# Altium PCB SolarPanel.PcbDoc
Units mm, origin at the board's own origin, x right, y up, seen from the top; angles counter-clockwise.
Board outline 96 x 213 mm, 2 copper layers (Top Layer, Bottom Layer); 126 components, 32 nets, 226 pads, 96 vias.
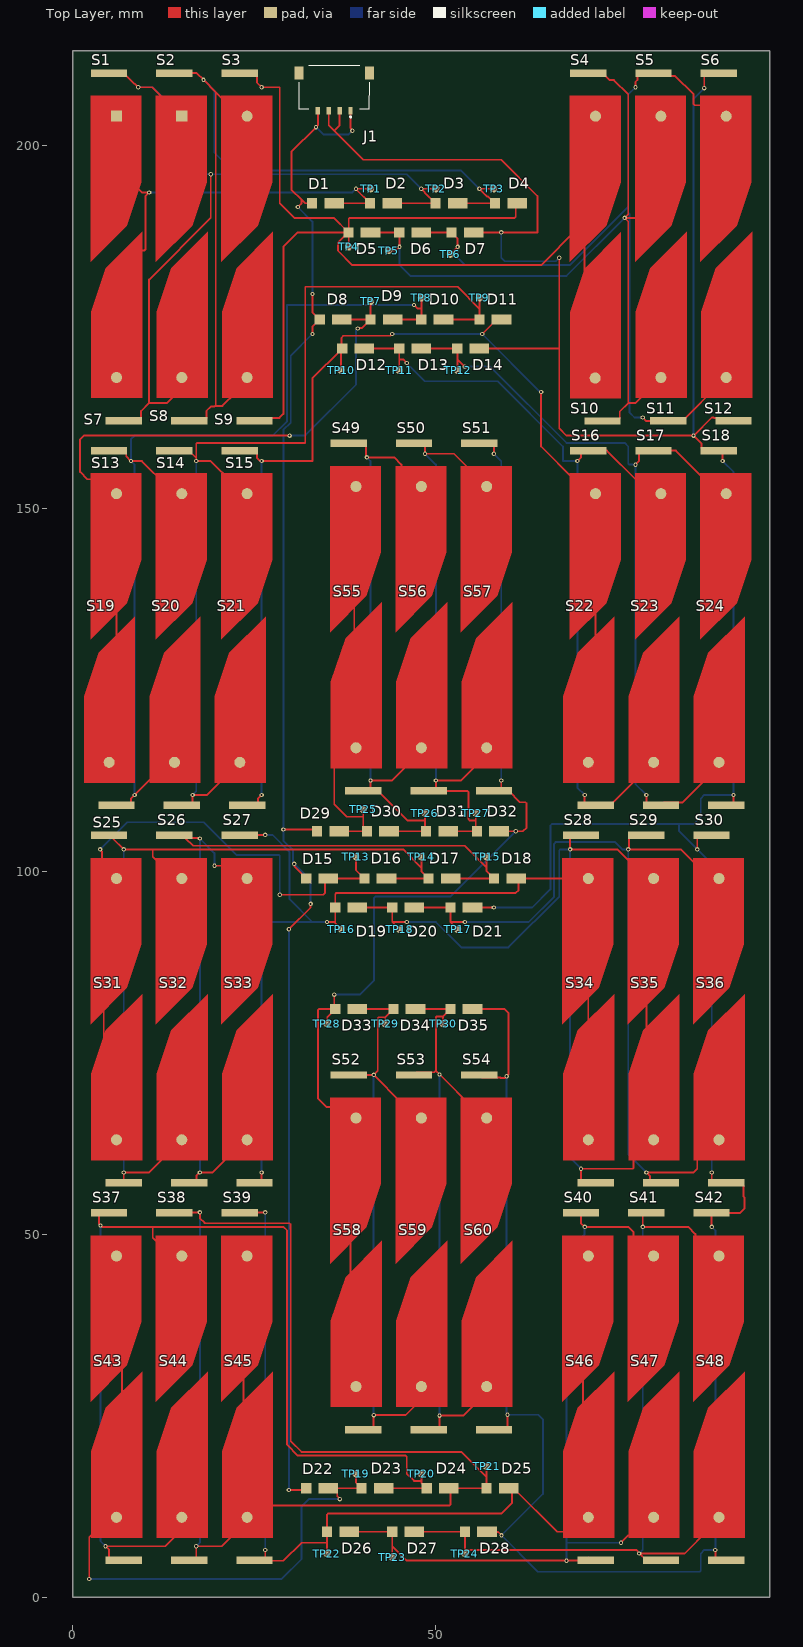
[diagram p0: Top Layer view]
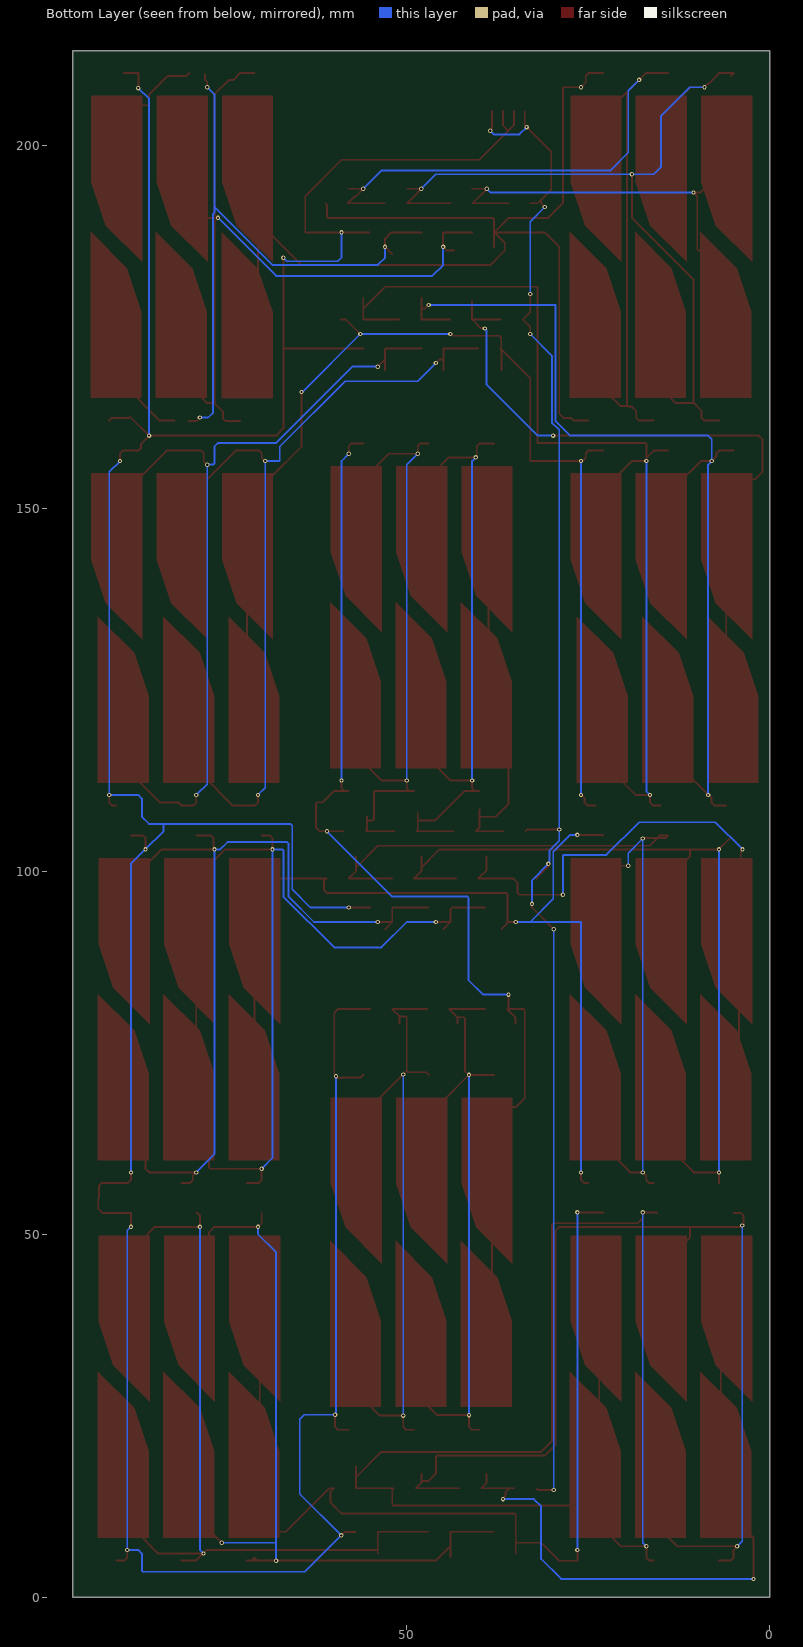
[diagram p1: Bottom Layer view, seen from below]

## Layer stack, top to bottom
Top Solder: solder mask 0.0102, Solder Resist, Dk 3.5
Top Layer: signal copper 0.0356
Dielectric 1: dielectric 0.32, FR-4, Dk 4.8
Bottom Layer: signal copper 0.0356
Bottom Solder: solder mask 0.0102, Solder Resist, Dk 3.5

## Board outline
0,0 96,0 96,213 0,213

## Design rules (kind name [scope] priority, off if disabled: settings)
Clearance [All] p1: gap=0.254 ignorepadtopadclearanceinfootprint=FALSE except(0: Arc-Hole Track-Hole SMDPad-Hole THPad-Hole Via-Hole Fill-Hole Poly-Hole Region-Hole Text-Hole)
PolygonConnect [All] p1: connectstyle=Relief reliefconductorwidth=0.254 reliefentries=4 polygonreliefangle="90 Angle" airgapwidth=0.254
RoomDefinition SolarPanel4 [InComponentClass('SolarPanel4')] p1: confinementstyle=ConfineIn formatcopy=TRUE lockcomponents=FALSE outline 0,0 96,0 96,213 0,213
RoutingVias [All] p1: holewidth=0.711 width=1.27 viastyle="Through Hole" minholewidth=0.711 minwidth=1.27 maxholewidth=0.711 maxwidth=1.27
SolderMaskExpansion [All] p1: expansion=0.102
Width [All] p1: maxlimit=0.254 minlimit=0.254 preferedwidth=0.254
30 further rules are at their usual default settings.

## Components (designator, comment, footprint, x,y, rotation, side; value= is the part's Value field where it differs from the comment)
D1 "SCHOTTKY_DIODE_B120-FDICT-NDSCHOTTKY_DIODE_B120-FDICT-ND" SB_DIODE 34.8,192 r180 top
D2 "SCHOTTKY_DIODE_B120-FDICT-NDSCHOTTKY_DIODE_B120-FDICT-ND" SB_DIODE 42.8,192 r180 top
D3 "SCHOTTKY_DIODE_B120-FDICT-NDSCHOTTKY_DIODE_B120-FDICT-ND" SB_DIODE 51.8,192 r180 top
D4 "SCHOTTKY_DIODE_B120-FDICT-NDSCHOTTKY_DIODE_B120-FDICT-ND" SB_DIODE 60,192 r180 top
D5 "SCHOTTKY_DIODE_B120-FDICT-NDSCHOTTKY_DIODE_B120-FDICT-ND" SB_DIODE 39.8,188 r180 top
D6 "SCHOTTKY_DIODE_B120-FDICT-NDSCHOTTKY_DIODE_B120-FDICT-ND" SB_DIODE 46.8,188 r180 top
D7 "SCHOTTKY_DIODE_B120-FDICT-NDSCHOTTKY_DIODE_B120-FDICT-ND" SB_DIODE 54,188 r180 top
D8 "SCHOTTKY_DIODE_B120-FDICT-NDSCHOTTKY_DIODE_B120-FDICT-ND" SB_DIODE 35.85,176 r180 top
D9 "SCHOTTKY_DIODE_B120-FDICT-NDSCHOTTKY_DIODE_B120-FDICT-ND" SB_DIODE 42.85,176 r180 top
D10 "SCHOTTKY_DIODE_B120-FDICT-NDSCHOTTKY_DIODE_B120-FDICT-ND" SB_DIODE 49.85,176 r180 top
D11 "SCHOTTKY_DIODE_B120-FDICT-NDSCHOTTKY_DIODE_B120-FDICT-ND" SB_DIODE 57.85,176 r180 top
D12 "SCHOTTKY_DIODE_B120-FDICT-NDSCHOTTKY_DIODE_B120-FDICT-ND" SB_DIODE 38.95,172 r180 top
D13 "SCHOTTKY_DIODE_B120-FDICT-NDSCHOTTKY_DIODE_B120-FDICT-ND" SB_DIODE 46.8,172 r180 top
D14 "SCHOTTKY_DIODE_B120-FDICT-NDSCHOTTKY_DIODE_B120-FDICT-ND" SB_DIODE 54.8,172 r180 top
D15 "SCHOTTKY_DIODE_B120-FDICT-NDSCHOTTKY_DIODE_B120-FDICT-ND" SB_DIODE 34,99 r180 top
D16 "SCHOTTKY_DIODE_B120-FDICT-NDSCHOTTKY_DIODE_B120-FDICT-ND" SB_DIODE 42,99 r180 top
D17 "SCHOTTKY_DIODE_B120-FDICT-NDSCHOTTKY_DIODE_B120-FDICT-ND" SB_DIODE 50.85,99 r180 top
D18 "SCHOTTKY_DIODE_B120-FDICT-NDSCHOTTKY_DIODE_B120-FDICT-ND" SB_DIODE 59.85,99 r180 top
D19 "SCHOTTKY_DIODE_B120-FDICT-NDSCHOTTKY_DIODE_B120-FDICT-ND" SB_DIODE 38,95 r180 top
D20 "SCHOTTKY_DIODE_B120-FDICT-NDSCHOTTKY_DIODE_B120-FDICT-ND" SB_DIODE 45.85,95 r180 top
D21 "SCHOTTKY_DIODE_B120-FDICT-NDSCHOTTKY_DIODE_B120-FDICT-ND" SB_DIODE 53.85,95 r180 top
D22 "SCHOTTKY_DIODE_B120-FDICT-NDSCHOTTKY_DIODE_B120-FDICT-ND" SB_DIODE 34,15 r180 top
D23 "SCHOTTKY_DIODE_B120-FDICT-NDSCHOTTKY_DIODE_B120-FDICT-ND" SB_DIODE 41.6,15 r180 top
D24 "SCHOTTKY_DIODE_B120-FDICT-NDSCHOTTKY_DIODE_B120-FDICT-ND" SB_DIODE 50.6,15 r180 top
D25 "SCHOTTKY_DIODE_B120-FDICT-NDSCHOTTKY_DIODE_B120-FDICT-ND" SB_DIODE 58.85,15 r180 top
D26 "SCHOTTKY_DIODE_B120-FDICT-NDSCHOTTKY_DIODE_B120-FDICT-ND" SB_DIODE 36.85,9 r180 top
D27 "SCHOTTKY_DIODE_B120-FDICT-NDSCHOTTKY_DIODE_B120-FDICT-ND" SB_DIODE 45.85,9 r180 top
D28 "SCHOTTKY_DIODE_B120-FDICT-NDSCHOTTKY_DIODE_B120-FDICT-ND" SB_DIODE 55.85,9 r180 top
D29 "SCHOTTKY_DIODE_B120-FDICT-NDSCHOTTKY_DIODE_B120-FDICT-ND" SB_DIODE 35.5,105.5 r180 top
D30 "SCHOTTKY_DIODE_B120-FDICT-NDSCHOTTKY_DIODE_B120-FDICT-ND" SB_DIODE 42.35,105.5 r180 top
D31 "SCHOTTKY_DIODE_B120-FDICT-NDSCHOTTKY_DIODE_B120-FDICT-ND" SB_DIODE 50.5,105.5 r180 top
D32 "SCHOTTKY_DIODE_B120-FDICT-NDSCHOTTKY_DIODE_B120-FDICT-ND" SB_DIODE 57.5,105.5 r180 top
D33 "SCHOTTKY_DIODE_B120-FDICT-NDSCHOTTKY_DIODE_B120-FDICT-ND" SB_DIODE 38,81 r180 top
D34 "SCHOTTKY_DIODE_B120-FDICT-NDSCHOTTKY_DIODE_B120-FDICT-ND" SB_DIODE 46,81 r180 top
D35 "SCHOTTKY_DIODE_B120-FDICT-NDSCHOTTKY_DIODE_B120-FDICT-ND" SB_DIODE 53.85,81 r180 top
J1 "5040500491" 5040500491 36,208 r0 top
S1 "SOLAR_CELL" SOLAR_CELL#1 2.444,183.934 r0 top
S2 "SOLAR_CELL" SOLAR_CELL#1 11.444,183.934 r0 top
S3 "SOLAR_CELL" SOLAR_CELL#2 20.444,183.934 r0 top
S4 "SOLAR_CELL" SOLAR_CELL#2 68.444,183.934 r0 top
S5 "SOLAR_CELL" SOLAR_CELL#2 77.444,183.934 r0 top
S6 "SOLAR_CELL" SOLAR_CELL#2 86.444,183.934 r0 top
S7 "SOLAR_CELL" SOLAR_CELL#2 9.556,188.066 r180 top
S8 "SOLAR_CELL" SOLAR_CELL#2 18.556,188.066 r180 top
S9 "SOLAR_CELL" SOLAR_CELL#2 27.556,188.066 r180 top
S10 "SOLAR_CELL" SOLAR_CELL#2 75.5,188 r180 top
S11 "SOLAR_CELL" SOLAR_CELL#2 84.556,188.066 r180 top
S12 "SOLAR_CELL" SOLAR_CELL#2 93.556,188.066 r180 top
S13 "SOLAR_CELL" SOLAR_CELL#2 2.444,131.934 r0 top
S14 "SOLAR_CELL" SOLAR_CELL#2 11.444,131.934 r0 top
S15 "SOLAR_CELL" SOLAR_CELL#2 20.444,131.934 r0 top
S16 "SOLAR_CELL" SOLAR_CELL#2 68.444,131.934 r0 top
S17 "SOLAR_CELL" SOLAR_CELL#2 77.444,131.934 r0 top
S18 "SOLAR_CELL" SOLAR_CELL#2 86.444,131.934 r0 top
S19 "SOLAR_CELL" SOLAR_CELL#2 8.556,135.066 r180 top
S20 "SOLAR_CELL" SOLAR_CELL#2 17.556,135.066 r180 top
S21 "SOLAR_CELL" SOLAR_CELL#2 26.556,135.066 r180 top
S22 "SOLAR_CELL" SOLAR_CELL#2 74.556,135.066 r180 top
S23 "SOLAR_CELL" SOLAR_CELL#2 83.556,135.066 r180 top
S24 "SOLAR_CELL" SOLAR_CELL#2 92.556,135.066 r180 top
S25 "SOLAR_CELL" SOLAR_CELL#2 2.444,78.934 r0 top
S26 "SOLAR_CELL" SOLAR_CELL#2 11.444,78.934 r0 top
S27 "SOLAR_CELL" SOLAR_CELL#2 20.444,78.934 r0 top
S28 "SOLAR_CELL" SOLAR_CELL#2 67.444,78.934 r0 top
S29 "SOLAR_CELL" SOLAR_CELL#2 76.444,78.934 r0 top
S30 "SOLAR_CELL" SOLAR_CELL#2 85.444,78.934 r0 top
S31 "SOLAR_CELL" SOLAR_CELL#2 9.556,83.066 r180 top
S32 "SOLAR_CELL" SOLAR_CELL#2 18.556,83.066 r180 top
S33 "SOLAR_CELL" SOLAR_CELL#2 27.556,83.066 r180 top
S34 "SOLAR_CELL" SOLAR_CELL#2 74.556,83.066 r180 top
S35 "SOLAR_CELL" SOLAR_CELL#2 83.556,83.066 r180 top
S36 "SOLAR_CELL" SOLAR_CELL#2 92.556,83.066 r180 top
S37 "SOLAR_CELL" SOLAR_CELL#2 2.444,26.934 r0 top
S38 "SOLAR_CELL" SOLAR_CELL#2 11.444,26.934 r0 top
S39 "SOLAR_CELL" SOLAR_CELL#2 20.444,26.934 r0 top
S40 "SOLAR_CELL" SOLAR_CELL#2 67.444,26.934 r0 top
S41 "SOLAR_CELL" SOLAR_CELL#2 76.444,26.934 r0 top
S42 "SOLAR_CELL" SOLAR_CELL#2 85.444,26.934 r0 top
S43 "SOLAR_CELL" SOLAR_CELL#2 9.556,31.066 r180 top
S44 "SOLAR_CELL" SOLAR_CELL#2 18.556,31.066 r180 top
S45 "SOLAR_CELL" SOLAR_CELL#2 27.556,31.066 r180 top
S46 "SOLAR_CELL" SOLAR_CELL#2 74.556,31.066 r180 top
S47 "SOLAR_CELL" SOLAR_CELL#2 83.556,31.066 r180 top
S48 "SOLAR_CELL" SOLAR_CELL#2 92.556,31.066 r180 top
S49 "SOLAR_CELL" SOLAR_CELL#2 35.444,132.934 r0 top
S50 "SOLAR_CELL" SOLAR_CELL#2 44.444,132.934 r0 top
S51 "SOLAR_CELL" SOLAR_CELL#2 53.444,132.934 r0 top
S52 "SOLAR_CELL" SOLAR_CELL#2 35.444,45.934 r0 top
S53 "SOLAR_CELL" SOLAR_CELL#2 44.444,45.934 r0 top
S54 "SOLAR_CELL" SOLAR_CELL#2 53.444,45.934 r0 top
S55 "SOLAR_CELL" SOLAR_CELL#2 42.556,137.066 r180 top
S56 "SOLAR_CELL" SOLAR_CELL#2 51.556,137.066 r180 top
S57 "SOLAR_CELL" SOLAR_CELL#2 60.556,137.066 r180 top
S58 "SOLAR_CELL" SOLAR_CELL#2 42.556,49.066 r180 top
S59 "SOLAR_CELL" SOLAR_CELL#2 51.556,49.066 r180 top
S60 "SOLAR_CELL" SOLAR_CELL#2 60.556,49.066 r180 top
TP1 "TEST_POINT" TEST_POINT 41,194 r180 top
TP2 "TEST_POINT" TEST_POINT 50,194 r180 top
TP3 "TEST_POINT" TEST_POINT 58,194 r180 top
TP4 "TEST_POINT" TEST_POINT 38,186 r180 top
TP5 "TEST_POINT" TEST_POINT 43.5,185.5 r180 top
TP6 "TEST_POINT" TEST_POINT 52,185 r180 top
TP7 "TEST_POINT" TEST_POINT 41,178.5 r180 top
TP8 "TEST_POINT" TEST_POINT 48,179 r180 top
TP9 "TEST_POINT" TEST_POINT 56,179 r90 top
TP10 "TEST_POINT" TEST_POINT 36.95,169 r180 top
TP11 "TEST_POINT" TEST_POINT 44.95,169 r180 top
TP12 "TEST_POINT" TEST_POINT 53,169 r180 top
TP13 "TEST_POINT" TEST_POINT 39,102 r180 top
TP14 "TEST_POINT" TEST_POINT 48,102 r180 top
TP15 "TEST_POINT" TEST_POINT 57,102 r180 top
TP16 "TEST_POINT" TEST_POINT 37,92 r180 top
TP17 "TEST_POINT" TEST_POINT 53,92 r180 top
TP18 "TEST_POINT" TEST_POINT 45,92 r180 top
TP19 "TEST_POINT" TEST_POINT 39,17 r180 top
TP20 "TEST_POINT" TEST_POINT 48,17 r180 top
TP21 "TEST_POINT" TEST_POINT 57,18 r180 top
TP22 "TEST_POINT" TEST_POINT 35,6 r180 top
TP23 "TEST_POINT" TEST_POINT 44,5.5 r180 top
TP24 "TEST_POINT" TEST_POINT 54,6 r180 top
TP25 "TEST_POINT" TEST_POINT 40,108.5 r180 top
TP26 "TEST_POINT" TEST_POINT 48.5,108 r180 top
TP27 "TEST_POINT" TEST_POINT 55.5,108 r180 top
TP28 "TEST_POINT" TEST_POINT 35,79 r180 top
TP29 "TEST_POINT" TEST_POINT 43,79 r180 top
TP30 "TEST_POINT" TEST_POINT 51,79 r180 top

## Footprints (in the part's own frame and the unit in brackets; to place one, negate y for a bottom-side part, rotate by r counter-clockwise, add the part's x,y. Pads: shape width x height; smd on the part's side, far side on the other; paste and mask are expansions set on the pad)
5040500491 [mm]
  rect 0.6x1 smd: 1(2.25,-3.247) 2(0.75,-3.247) 3(-0.75,-3.247) 4(-2.25,-3.247)
  rect 1.25x1.8 smd: MP1(4.855,1.943) MP2(-4.855,1.943)
  silkscreen extent -4.87,-4.2 4.87,3, body extent 0,0 0,0
SB_DIODE [mm]
  rect 2.7x1.4 smd: NEG(-1.2,0)
  rect 1.4x1.4 smd: POS(1.85,0)
SOLAR_CELL#1 [mil]
  rect 196.85x39.37 smd: NEG(100,1023.62)
  rect 60x60 smd: POS(140,790)
  Top Layer region: 0,900 275.59,900 275.59,433.07 196.85,196.85 0,0
SOLAR_CELL#2 [mil]
  rect 196.85x39.37 smd: NEG(100,1023.62)
  round 60 smd: POS(140,790)
  Top Layer region: 0,900 275.59,900 275.59,433.07 196.85,196.85 0,0
TEST_POINT [mil]
  round 40 smd: PAD(0,0)

## Part data
D1 D2 D3 D4 D5 D6 D7 D8 D9 D10 D11 D12 D13 D14 D15 D16 D17 D18 D19 D20 D21 D22 D23 D24 D25 D26 D27 D28 D29 D30 D31 D32 D33 D34 D35: Package=SCHOTTKY_DIODE_B120-FDICT-ND, DeviceName=SCHOTTKY_DIODE_B120-FDICT-ND, DeviceSetName=SCHOTTKY_DIODE_B120-FDICT-ND, GateName_1=G$1, LibraryName=Solar_Fadi, SymbolName_1=SCHOTTKY_DIODE_B120-FDICT-ND
J1: "Connector", Manufacturer_Name=Molex, Allied_Number=70331790, Allied Price/Stock=https://www.alliedelec.com/molex-incorporated-5040500491/70331790/, Datasheet Link=https://www.molex.com/pdm_docs/sd/5040500691_sd.pdf, Height=2.15mm, Manufacturer_Part_Number=5040500491

## Via types
v1: diameter 0.6, hole 0.3, Top Layer to Bottom Layer, tented both sides, 96 vias

## Nets (pads, with @x,y where several pads share a name; then routed paths per layer and width w, separated by ;. In a path a pad name is that pad's centre, name@x,y a point inside that pad or via, vN(x,y) a via of type N, cw(c..) or ccw(c..) an arc to the next point about the centre after c; other vN are vias at no path point)
GND: D7.NEG D14.NEG D21.NEG D28.NEG D35.NEG J1.2 J1.3 S6.NEG S12.NEG S18.NEG S24.NEG S30.NEG S36.NEG S42.NEG S48.NEG S54.NEG S60.NEG | length 525.6
  Top Layer w0.254: J1.3 35.25,202.75 36,202 ; J1.2 36.75,202.75 36,202 ; D35.NEG 59.5,81 60,80.5 60,72 v1(59.75,71.75) 59.5,71.5 58.959,71.5 58.898,71.561 56.357,71.561 S54.NEG ; D21.NEG v1(58,95) ; D7.NEG v1(59,188) 64,188 64,193 59,198 40,198 36,202 ; D14.NEG 67,172 ; D28.NEG 57.068,8.982 58.56,8.982 v1(59.042,8.5) ; S60.NEG 59.502,23.066 59.875,23.439 v1(59.875,25.125) ; v1(67,184.5) 67,172 ; v1(86,103) 86,104.561 86.373,104.934 S30.NEG ; v1(86.984,207.873) 86.984,209.934 S6.NEG ; v1(88,51) 87.984,51.016 S42.NEG 91.934,52.934 92.5,53.5 92.5,55.041 92.389,55.152 92.389,56.693 92.016,57.066 S36.NEG 88.373,57.066 88,57.439 v1(88,58.5) ; v1(88.5,6.5) 88.5,5.439 88.873,5.066 S48.NEG ; v1(89.5,156.5) 89.5,157.561 89.127,157.934 S18.NEG 86.984,157.934 86.611,158.307 86.611,158.889 v1(85.5,160) ; S24.NEG 90.627,109.066 91,109.439 v1(91,110.5) ; S12.NEG 90.643,162.439 88.315,162.439 88.254,162.5 88,162.5 v1(85.5,160) ; 67,172 67,161 68,160 v1(85.5,160)
  Bottom Layer w0.254: v1(58,95) 63.274,95 65.774,97.5 65.774,106.274 66,106.5 83.5,106.5 ; v1(59,188) 59,184.516 59.5,184.016 66.516,184.016 v1(67,184.5) ; v1(59.75,71.75) 59.75,25.25 v1@60,25 ; v1(59.875,25.125) 64.125,25.125 64.75,24.5 64.75,14.208 v1(59.042,8.5) 64.042,3.5 86.351,3.5 86.5,3.649 86.5,6 87,6.5 v1(88.5,6.5) 88.5,50.5 v1(88,51) ; v1(85.5,160) 85.5,206.389 v1(86.984,207.873) ; v1(88,58.5) 88,101 v1(86,103) 83.5,105.5 83.5,106.5 ; v1(89.5,156.5) 91,155 v1(91,110.5) 87,110.5 86.5,110 86.5,107.5 85.5,106.5 83.5,106.5
NetD2_NEG: D2.NEG D3.POS S1.NEG S2.POS S7.NEG S8.POS TP2.PAD | length 116.2
  Top Layer w0.254: S1.NEG@5.357,209.561 S1.NEG 6.984,209.934 8.436,208.482 8.518,208.482 v1(9,208) 10.913,208 12.5,206.413 ; S7.NEG 9.016,162.066 9.389,162.439 9.389,163.389 10.5,164.5 ; 11.946,206.413 12.5,206.413 ; 13,206 13,206.264 12.851,206.413 12.5,206.413 ; 14.5,167 14.5,166 13,164.5 10.5,164.5 ; v1(19,196) 19,190 10.5,181.5 10.5,164.5 ; D2.NEG D3.POS 48.482,193.469 48.482,193.518 v1(48,194) TP2.PAD
  Bottom Layer w0.254: v1(9,208) 11,208 15,204 15,197 16,196 v1(19,196) 46,196 v1(48,194)
NetD2_POS: D1.NEG D2.POS S1.POS S7.POS TP1.PAD | length 51.4
  Top Layer w0.254: 7.5,192 8,192 8.097,192.097 ; 8,194.5 8.5,194.5 9.5,193.5 v1(10.5,193.5) 10,193 10,185.649 9.851,185.5 9.5,185.5 9,185 ; 8.5,194.941 8.5,195 ; D1.NEG D2.POS 39,193.95 39.05,194 TP1.PAD
  Bottom Layer w0.254: v1(10.5,193.5) 38.5,193.5 v1(39,194)
NetD3_NEG: D3.NEG D4.POS S2.NEG S3.POS S8.NEG S9.POS TP3.PAD | length 119.9
  Top Layer w0.254: S2.NEG 17.066,209.934 v1(18,209) 19.681,207.319 ; S8.NEG 18.016,162.066 18.389,162.439 18.389,163.389 19,164 19.5,164 19.59,164.09 ; 21,206 19.681,207.319 ; 22.5,166 20.59,164.09 19.59,164.09 ; D3.NEG D4.POS 57.218,192.932 57.068,192.932 v1(56,194) TP3.PAD ; 19.59,164.09 19.681,164.181 19.681,207.319
  Bottom Layer w0.254: v1(18,209) 19.5,207.5 19.5,199 21.992,196.508 53.492,196.508 v1(56,194)
NetD4_NEG: D4.NEG D5.POS S3.NEG S4.POS S9.NEG S10.POS TP4.PAD | length 145.7
  Top Layer w0.254: S3.NEG 24.984,209.934 25.357,209.561 25.357,208.643 v1(26,208) 28.5,208 28.5,192 30.5,190 35.95,190 37.9,188.05 38,188.05 38,189.851 38.149,190 60.851,190 61,190.149 61,191.8 D4.NEG ; S9.NEG 27.016,162.066 27.389,162.439 28.439,162.439 29,163 29,186 31,188 D5.POS ; TP4.PAD 38,187.95 D5.POS ; 69.5,188.5 64.5,183.5 38.5,183.5 36.5,185.5 36.5,186.55 D5.POS ; 70.5,187.5 70.5,181.5 71,181
NetD5_NEG: D5.NEG D6.POS S4.NEG S5.POS S10.NEG S11.POS TP5.PAD | length 107.9
  Top Layer w0.254: D5.NEG D6.POS 45,187.95 v1(45,186) 44.5,185.5 TP5.PAD ; S4.NEG 72.984,209.934 73.936,208.982 74.518,208.982 76.5,207 76.5,206.5 76.5,190.5 v1(76,190) ; S10.NEG 74.96,162 75.333,162.373 75.333,163.323 76.5,164.49 ; 78,190 v1(76,190) ; S11.POS 77.49,164.49 76.5,164.49 ; v1(76,190) 76.5,189.5 76.5,164.49
  Bottom Layer w0.254: v1(45,186) 45,183.5 46.5,182 68,182 v1(76,190)
NetD6_NEG: D6.NEG D7.POS S5.NEG S6.POS S11.NEG S12.POS TP6.PAD | length 109.9
  Top Layer w0.254: D6.NEG D7.POS 53,187.15 v1(53,186) TP6.PAD ; v1(77.5,208) 77.5,208.755 77.798,209.053 S5.NEG@77.798,209.747 ; v1(78.5,162.5) 79,162 S11.NEG@80,162 ; S5.NEG 80.357,209.561 82.939,209.561 85.5,207 85.5,205.649 85.649,205.5 88.5,205.5 89,205 ; S11.NEG 84.016,162.066 89.142,167.192 89.192,167.192 S12.POS
  Bottom Layer w0.254: v1(53,186) 53,184.5 53.992,183.508 68.508,183.508 76.5,191.5 ; v1(77.5,208) 76.5,207 76.5,191.5 ; v1(78.5,162.5) 77.362,162.5 76.681,163.181 76.681,190.518 76.5,190.699 76.5,191.5
NetD9_NEG: D9.NEG D10.POS S13.NEG S14.POS S19.NEG S20.POS TP8.PAD | length 134.5
  Top Layer w0.254: S13.NEG 6.984,157.934 7.357,157.561 7.357,157.143 v1(8,156.5) 9.5,156.5 13,153 ; S19.NEG 7.645,109.066 8.018,109.439 8.018,110.018 v1(8.5,110.5) 12.763,114.763 13.763,114.763 S20.POS ; D9.NEG D10.POS 48,177.5 ; v1(47,178) 47.5,177.5 48,177.5 ; TP8.PAD 48,177.5
  Bottom Layer w0.254: v1(8.5,110.5) 8.5,156 v1(8,156.5) 8,159.5 8.5,160 27.5,160 29.5,162 29.5,178 v1(47,178)
NetD9_POS: D8.NEG D9.POS S13.POS S19.POS TP7.PAD | length 73.3
  Top Layer w0.254: 3,154 2,154 1,155 1,159.5 1.5,160 v1(29.851,160) ; 6,131.5 6,139.5 6.5,140 ; D8.NEG D9.POS ; v1(39.25,174.75) 39.316,174.816 39.816,174.816 D9.POS ; TP7.PAD D9.POS
  Bottom Layer w0.254: v1(29.851,160) 29.883,160.032 32.032,160.032 39,167 39,174.5 v1(39.25,174.75)
NetD10_NEG: D10.NEG D11.POS S14.NEG S15.POS S20.NEG S21.POS TP9.PAD | length 139.1
  Top Layer w0.254: S14.NEG 15.984,157.934 17,156.918 ; S20.NEG 16.127,109.066 16.5,109.439 v1(16.5,110.5) 18.5,110.5 S21.POS ; 22,153.5 19,156.5 v1(17,156.5) 17,156.918 ; D10.NEG D11.POS 56,177.5 ; TP9.PAD 56,177.5 ; 17,156.918 17,158.851 17.149,159 32,159 32,180.5 53,180.5 56,177.5
  Bottom Layer w0.254: v1(16.5,110.5) 17,111 v1(17,156.5)
NetD11_NEG: D11.NEG D12.POS S15.NEG S16.POS S21.NEG S22.POS TP10.PAD | length 135.4
  Top Layer w0.254: S15.NEG 24.984,157.934 25.357,157.561 25.357,156.933 25.79,156.5 v1(26,156.5) 33,156.5 33,167.9 D12.POS@36.95,171.85 ; S21.NEG 25.145,109.066 25.518,109.439 25.518,110.018 v1(26,110.5) ; TP10.PAD D12.POS@36.95,171.85 ; D12.POS@37,172.1 37,173.479 37.271,173.75 43.75,173.75 v1(44,174) ; D12.POS D12.POS@36.95,171.85 ; v1(56.4,174) 58.4,176 D11.NEG ; v1(64.5,166) 64.5,158.5 69,154 ; 72,131.5 72,136.5 72.5,137
  Bottom Layer w0.254: v1(26,110.5) v1(26,156.5) ; v1(44,174) v1(56.4,174) 64.4,166 v1(64.5,166)
NetD12_NEG: D12.NEG D13.POS S16.NEG S17.POS S22.NEG S23.POS TP11.PAD | length 108.1
  Top Layer w0.254: D12.NEG D13.POS 44.95,170.5 ; TP11.PAD 44.95,170.5 ; v1(46,170) 45.5,170.5 44.95,170.5 ; v1(69.5,156.5) 69.982,156.982 69.982,157.561 70.355,157.934 S16.NEG 73.566,157.934 77.5,154 78.5,154 ; v1(70.5,110.5) 70.5,109.439 70.873,109.066 S22.NEG 74.016,109.066 78,113.05 78,113.5
  Bottom Layer w0.254: v1(46,170) 48.5,167.5 58.5,167.5 67.5,158.5 67.5,156.5 v1(69.5,156.5) 69.5,111.5 v1(70.5,110.5)
NetD13_NEG: D13.NEG D14.POS S17.NEG S18.POS S23.NEG S24.POS TP12.PAD | length 111.3
  Top Layer w0.254: D13.NEG D14.POS 53,171.95 53,170.475 ; TP12.PAD 53,170.475 ; v1(54,169.5) 53.025,170.475 53,170.475 ; v1(77.5,156) 77.982,156.482 77.982,157.561 78.355,157.934 S17.NEG 83.066,157.934 87,154 ; v1(79,110.5) 79,109.439 79.373,109.066 S23.NEG 81.389,109.439 83.939,109.439 88.5,114
  Bottom Layer w0.254: v1(54,169.5) 57.5,169.5 68,159 76,159 76.5,158.5 76.5,156.149 76.649,156 v1(77.5,156) 77.5,112 v1(79,110.5)
NetD15_NEG: D15.NEG D16.POS S25.POS S31.POS TP13.PAD | length 58.9
  Top Layer w0.254: v1(3.75,103) 4,102.75 4,101.25 ; 4.25,81.5 4.25,75.25 4.5,75 ; v1(28.5,96.75) 34.5,96.75 34.75,97 34.75,98.427 35.323,99 D16.POS 39,100.15 TP13.PAD
  Bottom Layer w0.254: v1(3.75,103) 7.5,106.75 18,106.75 22.5,102.25 28.351,102.25 28.5,102.101 v1(28.5,96.75)
NetD16_NEG: D16.NEG D17.POS S25.NEG S26.POS S31.NEG S32.POS TP14.PAD | length 111.2
  Top Layer w0.254: S25.NEG@5.5,104.5 v1(7,103) 11,103 ; S31.NEG 7.016,58.484 v1(7,58.5) 10.5,58.5 S32.POS ; 11.75,101.25 11,102 11,103 ; D16.NEG D17.POS 48,100 48,100.5 ; TP14.PAD 48,100.5 ; 11,103 45.5,103 48,100.5
  Bottom Layer w0.254: v1(7,58.5) v1(7,103)
NetD17_NEG: D17.NEG D18.POS S26.NEG S27.POS S32.NEG S33.POS TP15.PAD | length 120.6
  Top Layer w0.254: S32.NEG 16.645,57.066 17.018,57.439 17.018,58.018 v1(17.5,58.5) 19.25,58.5 22.75,62 ; v1(17.5,104.5) 17.439,104.561 S26.NEG@15.5,104.561 ; v1(19.5,100.75) 21,100.75 22.25,99.5 ; D17.NEG D18.POS 57,100 57,100.5 ; TP15.PAD 57,100.5 ; S26.NEG@15.5,104.561 16.553,103.508 53.992,103.508 57,100.5 ; S26.NEG@15.5,104.561 15.127,104.934 S26.NEG 14.357,104.561 S26.NEG@15.5,104.561
  Bottom Layer w0.254: v1(17.5,58.5) v1(17.5,104.5) 19.5,102.5 v1@19.5,101
NetD18_NEG: D18.NEG D19.POS S27.NEG S28.POS S33.NEG S34.POS TP16.PAD | length 112.6
  Top Layer w0.254: S27.NEG 23.05,105 v1(26.5,105) ; S33.NEG 25.627,57.066 26,57.439 v1(26,58.5) ; v1(35,93) 36,93 ; TP16.PAD 36.15,92.85 D19.POS 36.15,96.85 36.3,97 61,97 61.395,97.395 61.395,98.655 D18.NEG S28.POS ; 71,83 71,79 71.5,78.5
  Bottom Layer w0.254: v1(26,58.5) 26,93 33,93 ; v1(26.5,105) 27.5,105 29.819,102.681 29.819,96.181 33,93 ; v1(35,93) 33,93
NetD19_NEG: D19.NEG D20.POS S28.NEG S29.POS S34.NEG S35.POS TP18.PAD | length 120.8
  Top Layer w0.254: D19.NEG 43.75,95 44,94.75 44,93 ; TP18.PAD 44,93 ; v1(46,93) 44,93 ; S28.NEG 68.873,104.934 68.5,104.561 v1(68.5,103) 75,103 77,101 ; S34.NEG 70.373,57.066 70,57.439 v1(70,59) 77.101,59 77.25,59.149 77.25,61.25 78,62 ; 79,82.25 79,76.5 79.25,76.25
  Bottom Layer w0.254: v1(46,93) 50,93 53.5,89.5 60,89.5 67,96.5 67,102.851 67.149,103 v1(68.5,103) 68.5,60.5 v1(70,59)
NetD20_NEG: D20.NEG D21.POS S29.NEG S30.POS S35.NEG S36.POS TP17.PAD | length 115.6
  Top Layer w0.254: D20.NEG D21.POS 52,93 ; TP17.PAD 52,93 ; v1(54,93) 52,93 ; S29.NEG 76.984,104.934 76.611,104.561 76.611,103.205 76.5,103.094 v1(76.5,103) 83.75,103 86,100.75 ; S35.NEG 79.855,57.066 79.482,57.439 79.482,58.018 v1(79,58.5) 85.5,58.5 86,59 86,61.5 86.5,62
  Bottom Layer w0.254: v1(54,93) 62.782,93 66.282,96.5 66.282,103.782 66.5,104 74.7,104 75.7,103 v1(76.5,103) 76.5,61 v1(79,58.5)
NetD22_NEG: D22.NEG D23.POS S37.POS S43.POS TP19.PAD | length 66.3
  Top Layer w0.254: v1(2.25,2.5) 2.25,8.25 3,9 ; 6.75,27.25 6.75,34.75 ; D22.NEG D22.NEG@35.85,15 ; v1(36.75,13.5) 36.75,13.594 36.423,13.921 36.423,14.427 D22.NEG@35.85,15 ; TP19.PAD 39,15.75 D23.POS D22.NEG@35.85,15
  Bottom Layer w0.254: v1(2.25,2.5) 28.75,2.5 31.5,5.25 31.5,12.5 32.5,13.5 v1(36.75,13.5)
NetD22_POS: D1.POS D8.POS D15.POS D22.POS D29.POS J1.1 J1.4 | length 218.5
  Top Layer w0.254: v1(29,105.75) 33.4,105.75 D29.POS ; v1(29.75,14.75) 31.9,14.75 D22.POS ; v1(29.75,92) 32.75,95 v1(32.75,95.5) ; v1(30.5,101) 30.5,100.65 D15.POS ; v1(30.996,191.496) 31.5,192 31.5,192.5 ; D1.POS 32,192 31.5,192.5 ; v1(33,174) 33,175 D8.POS 33,177 v1(33,179.5) ; J1.4 33.75,202.75 v1(33.5,202.5) 30.105,199.105 30.105,193.895 31.5,192.5 ; J1.1 38.25,202.344 38.5,202.094 v1(38.5,202)
  Bottom Layer w0.254: v1(29.75,14.75) v1(29.75,92) ; v1(30.996,191.496) 33,189.492 v1(33,179.5) ; v1(32.75,95.5) 32.75,98.75 v1(30.5,101) 30.327,101.173 30.327,102.891 29,104.218 v1(29,105.75) 29,160.782 30.008,161.79 30.008,171.008 v1(33,174) ; v1(33.5,202.5) 34.5,201.5 38,201.5 v1(38.5,202)
NetD23_NEG: D23.NEG D24.POS S37.NEG S38.POS S43.NEG S44.POS TP20.PAD | length 150.7
  Top Layer w0.254: S37.NEG 3.978,52.934 3.605,52.561 3.605,51.395 v1(3.803,51.197) 4,51 11,51 ; S43.NEG 5.355,5.066 4.982,5.439 4.982,6.518 v1(4.5,7) 12.75,7 14.25,8.5 ; 12.25,48.25 11,49.5 11,51 ; D23.NEG D24.POS 48,15.75 48,16 ; TP20.PAD 48,16 ; 11,51 29,51 29.5,50.5 29.5,21 31,19.5 45.851,19.5 46,19.351 46,17 47,16 48,16
  Bottom Layer w0.254: v1(3.803,51.197) 3.803,7.697 v1(4.5,7)
NetD24_NEG: D24.NEG D25.POS S38.NEG S39.POS S44.NEG S45.POS TP21.PAD | length 171.4
  Top Layer w0.254: S38.NEG@15.5,52.934 15.566,53 v1(17.5,53) 17.5,52.2 18.139,51.561 ; S44.NEG 16.627,5.066 17,5.439 v1(17,7) 20.5,7 22.75,9.25 ; 18.139,51.508 29.843,51.508 29.992,51.359 29.992,50.726 30.008,50.71 30.008,21.492 31.492,20.008 53.492,20.008 57,16.5 ; 23.5,25.75 23.5,31 ; 26.75,13 27.141,12.609 51.851,12.609 52,12.758 52,14.8 D24.NEG D25.POS 57,16.5 ; TP21.PAD 57,16.5
  Bottom Layer w0.254: v1(17,7) 17.5,7.5 v1(17.5,53)
NetD25_NEG: D25.NEG D26.POS S39.NEG S40.POS S45.NEG S46.POS TP22.PAD | length 111.2
  Top Layer w0.254: S39.NEG 23.05,53 v1(26.5,53) ; v1(26.5,6.5) 26.5,5 29,5 31.5,7.5 35,7.5 ; TP22.PAD 35,7.5 ; 68.5,9 66.7,9 60.7,15 D25.NEG 60.5,14.55 60.5,13 59,11.5 35.149,11.5 35,11.351 D26.POS 35,7.5 ; 70.25,30.25 70.25,25.5 70.75,25
  Bottom Layer w0.254: v1(26.5,6.5) v1(26.5,53)
NetD26_NEG: D26.NEG D27.POS S40.NEG S41.POS S46.NEG S47.POS TP23.PAD | length 107.2
  Top Layer w0.254: D26.NEG D27.POS 44,7 ; TP23.PAD 44,7 ; S40.NEG 69.984,51.516 v1(70.5,51) 76.5,51 77.25,50.25 77.25,48.5 ; S46.NEG@70.561,5 71,5.439 S46.NEG@71.373,5.066 ; S46.NEG@72.082,5 S46.NEG S46.NEG@71.373,5.066 ; v1(75.5,7.5) 76.5,8.5 77.25,8.5 ; 44,7 45.934,5.066 S46.NEG@71.373,5.066
  Bottom Layer w0.254: v1(68,5) 68,7.5 ; v1(70.5,51) 70.5,50 68,47.5 68,7.5 ; v1(75.5,7.5) 68,7.5
NetD27_NEG: D27.NEG D28.POS S41.NEG S42.POS S47.NEG S48.POS TP24.PAD | length 105
  Top Layer w0.254: D27.NEG D28.POS TP24.PAD@54,6.5 ; TP24.PAD TP24.PAD@54,6.5 ; v1(78,6) v1@78.082,6 ; S41.NEG 78.873,52.934 78.5,52.561 v1(78.5,51) 84.75,51 85.75,50 85.75,48.5 ; S47.NEG 79.016,5.066 v1@78.082,6 ; 87.5,9.25 84.25,6 v1@78.082,6 ; TP24.PAD@54,6.5 77.582,6.5 v1@78.082,6
  Bottom Layer w0.254: v1(78,6) 78.5,6.5 v1(78.5,51)
NetD29_NEG: D29.NEG D30.POS S49.POS S55.POS TP25.PAD | length 22.8
  Top Layer w0.254: 36,114.5 36,109.25 37.75,107.5 40,107.5 ; D29.NEG D30.POS 40,106 40,107.5 ; 38.75,131.75 38.75,137.25 39,137.5 ; TP25.PAD 40,107.5
NetD30_NEG: D30.NEG D31.POS S49.NEG S50.POS S55.NEG S56.POS TP26.PAD | length 80.7
  Top Layer w0.254: S49.NEG 39.984,158.934 40.357,158.561 40.357,157.237 40.5,157.094 v1(40.5,157) 44.25,157 45.25,156 45.25,155.25 ; S55.NEG S55.NEG@40.627,111.066 ; D30.NEG D31.POS 48.5,105.65 48.5,107 ; 46.5,115 44,112.5 v1(41,112.5) 41,111.439 S55.NEG@40.627,111.066 ; TP26.PAD 48.5,107 ; S55.NEG@40.627,111.066 42.016,111.066 46.082,107 48.5,107
  Bottom Layer w0.254: v1(40.5,157) 41,156.5 v1(41,112.5)
NetD31_NEG: D31.NEG D32.POS S50.NEG S51.POS S56.NEG S57.POS TP27.PAD | length 80.4
  Top Layer w0.254: S50.NEG 48.127,158.934 48.5,158.561 v1(48.5,157.5) 52.5,157.5 54.5,155.5 54.5,155.25 ; S56.NEG S56.NEG@49.627,111.066 ; D31.NEG D32.POS 55.5,105.65 55.5,107 ; TP27.PAD@55.5,107.5 55.5,107 ; 56,115 53.5,112.5 v1(50,112.5) 50,111.439 S56.NEG@49.627,111.066 ; S56.NEG@49.627,111.066 54.351,111.066 54.5,110.917 54.5,107.149 54.649,107 55.5,107
  Bottom Layer w0.254: v1(48.5,157.5) 50,156 v1(50,112.5)
NetD32_NEG: D32.NEG D33.POS S51.NEG S52.POS S57.NEG S58.POS TP28.PAD | length 131.1
  Top Layer w0.254: TP28.PAD 35.039,79.039 35.039,79.889 D33.POS ; v1(36,83) 36,81.15 D33.POS ; 36.25,67.5 35,67.5 33.75,68.75 33.75,80.851 33.899,81 D33.POS ; 38.25,44.25 38.25,49.5 ; S51.NEG 57.627,158.934 58,158.561 v1(58,157.5) ; S57.NEG S57.NEG@58.627,111.066 ; D32.NEG v1(61,105.5) 62,105.5 62.5,106 62.5,109.351 62.351,109.5 61.582,109.5 60.016,111.066 S57.NEG@58.627,111.066 ; v1(59,112.5) 59,111.439 S57.NEG@58.627,111.066
  Bottom Layer w0.254: v1(36,83) 39.5,83 41.5,85 41.5,96.351 41.649,96.5 52,96.5 v1(61,105.5) ; v1(58,157.5) 59,156.5 v1(59,112.5)
NetD33_NEG: D33.NEG D34.POS S52.NEG S53.POS S58.NEG S59.POS TP29.PAD | length 84
  Top Layer w0.254: S52.NEG v1(41.434,71.934) ; D33.NEG D34.POS 43.039,79.889 ; S58.NEG 41.061,23.066 41.434,23.439 v1(41.434,25.066) 45.816,25.066 48.25,27.5 ; TP29.PAD 43.039,79.039 43.039,79.889 ; 45.25,67.5 45.25,68.118 v1(41.434,71.934) ; v1(41.434,71.934) 42,72.5 42,79.74 42.149,79.889 43.039,79.889
  Bottom Layer w0.254: v1(41.434,71.934) v1(41.434,25.066) v1@41.5,25
NetD34_NEG: D34.NEG D35.POS S53.NEG S54.POS S59.NEG S60.POS TP30.PAD | length 82.6
  Top Layer w0.254: S53.NEG 47.357,72.307 49.807,72.307 50,72.5 ; D34.NEG D35.POS 51,80 ; S59.NEG 50.127,23.066 50.5,23.439 v1(50.5,25) 53.75,25 55.75,27 ; TP30.PAD 51,80 ; 55.25,67.25 v1(50.5,72) 50,72.5 ; 50,72.5 50,79.851 50.149,80 51,80
  Bottom Layer w0.254: v1(50.5,25) v1(50.5,72)
pads on no net: J1.MP1 J1.MP2